# Altium PCB PumpkinV1.PcbDoc
Units mil, origin at the board's own origin, x right, y up, seen from the top; angles counter-clockwise.
Board outline 3745.29 x 3094.45 mil, 2 copper layers (Top Layer, Bottom Layer); 32 components, 42 nets, 161 pads, 0 vias.
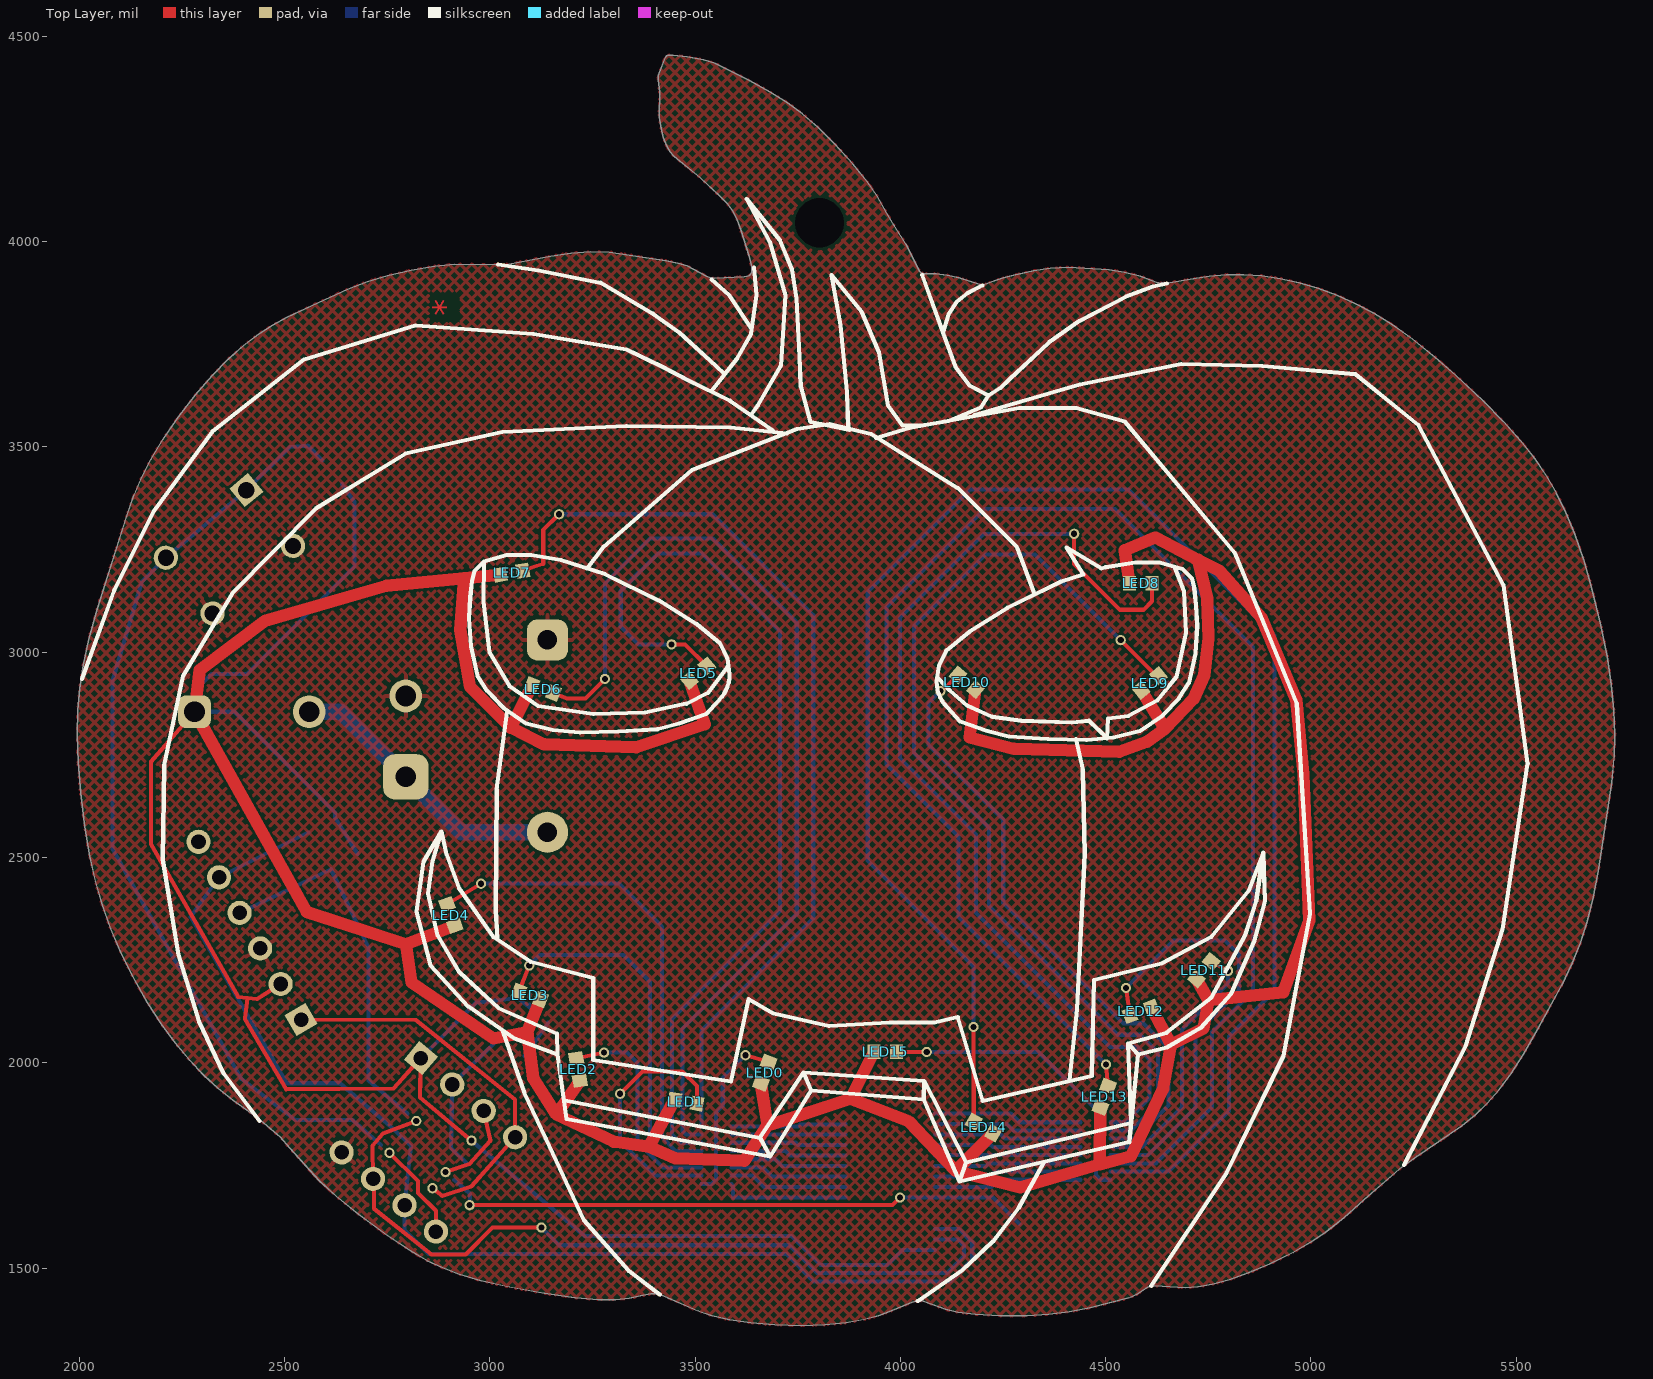
[diagram p0: Top Layer view]
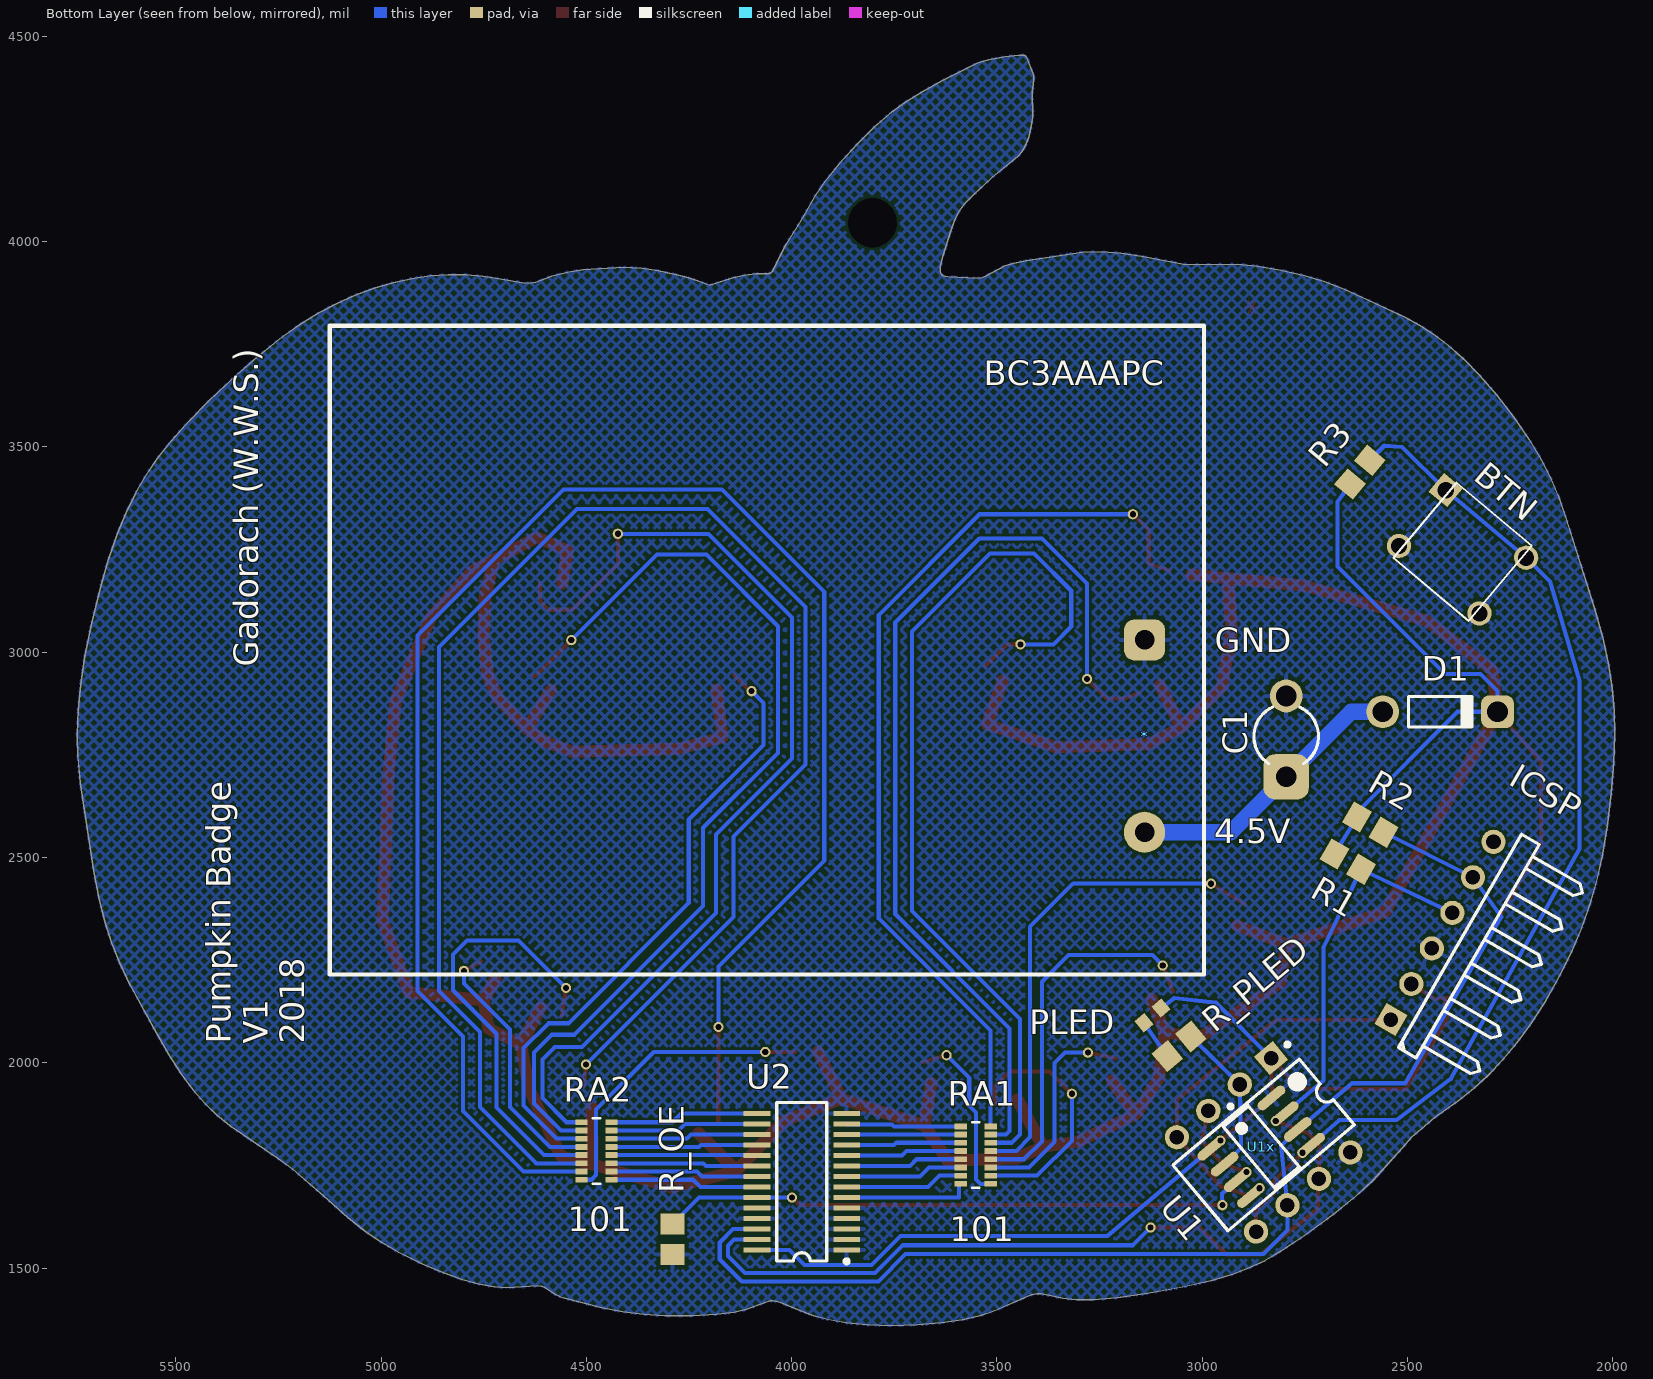
[diagram p1: Bottom Layer view, seen from below]

## Layer stack, top to bottom
Top Solder: solder mask 0.4, Solder Resist, Dk 3.5
Top Layer: signal copper 1.4
Dielectric 1: dielectric 12.6, FR-4, Dk 4.8
Bottom Layer: signal copper 1.4
Bottom Solder: solder mask 0.4, Solder Resist, Dk 3.5

## Board outline
2488.98,1819.07 2512.55,1792.4 2584.14,1712.75 2624.83,1675.61 2679.51,1631.18 2746.7,1581.62 2806.05,1541.98 2847.14,1518.13 2885.01,1500.19 2925.11,1485.11 2978.48,1469.45 3046.85,1453.74 3132.1,1438.17 3207.31,1427.81 3264.36,1423.12 3306.25,1423.06 3339.05,1426.28 3366.54,1431.88 3391.8,1437.02 3402.8,1437.06 3415.23,1434.63 3432.93,1427.95 3506.81,1395.29 3541.24,1384.01 3583.78,1374.14 3635.05,1366.32 3694,1361.3 3758,1359.79 3815.16,1361.83 3866.74,1366.93 3910.79,1374.54 3946.72,1384.03 3978.44,1395.82 4028.22,1416.56 4038.06,1419.16 4044.82,1420.01 4052.45,1419.67 4059.28,1418.19 4109.48,1399.27 4139.5,1392.64 4182.55,1387.36 4241.63,1384 4308.95,1383.92 4361.62,1387 4410.81,1393.3 4461.88,1403.21 4556.7,1426.99 4576.07,1436.45 4601.6,1452.93 4609.25,1455.14 4619.24,1456.26 4694.09,1452.32 4724.61,1454.21 4759.78,1460.34 4800.93,1471.4 4848.16,1487.98 4900.69,1510.25 4956.29,1537.73 4999.03,1562.57 5037.36,1588.65 5080.29,1622.54 5129.46,1666.17 5215.58,1741.08 5253.52,1768.37 5367.69,1846.28 5400.79,1873.47 5429.09,1900.93 5457.78,1934.02 5486.65,1973.07 5517.08,2020.46 5552.71,2082.25 5610.43,2188.31 5636.87,2243.24 5656.03,2290.99 5671.74,2340.4 5685.9,2397.31 5699.43,2466.53 5732.61,2682.14 5738.2,2743.67 5739.97,2800.08 5737.95,2858.67 5731.94,2921.39 5721.54,2989.66 5706.14,3065.88 5684.35,3155.04 5664.21,3225.09 5642.73,3287.69 5620.85,3340.89 5598,3387.59 5573.87,3429.27 5545.01,3471.62 5510.53,3515.4 5469.22,3561.74 5418.81,3612.74 5353.5,3673.88 5302.3,3718.92 5247.25,3763.09 5198.88,3797.42 5153.27,3825.61 5108.85,3849.13 5063.56,3869.37 5017.39,3886.43 4970.99,3900.1 4924.94,3910.24 4879.73,3916.85 4835.72,3919.98 4793.19,3919.71 4752.33,3916.18 4713.23,3909.52 4649.06,3899.14 4629.25,3899.71 4623.06,3901.34 4585.09,3915.87 4545.29,3925.93 4508.13,3931.64 4408.51,3938.08 4364.6,3935.36 4323.85,3929.34 4275.38,3918.48 4251.28,3911.81 4232.83,3905.75 4200.71,3894.58 4197.36,3894.75 4191.98,3896.09 4142.49,3912.24 4114.23,3918.16 4086.58,3921.69 4062.12,3921.8 4055.71,3922.26 4053.24,3922.95 4051.53,3923.74 4049.6,3925.07 4047.16,3927.55 4044.81,3930.85 4013.65,3993.8 3984.27,4040.04 3965.95,4070.37 3942.74,4111.7 3918.56,4146.33 3884.06,4189.04 3839.85,4237.89 3798.85,4278.67 3761.14,4311.44 3724.96,4338.33 3683.24,4364.53 3631.37,4393.03 3548.61,4434.47 3520.29,4443.05 3480.04,4450.56 3446.87,4454.19 3436,4454.24 3433.25,4453.82 3431.58,4453.26 3430.5,4452.67 3429.32,4451.75 3427.88,4450.09 3426.45,4447.78 3410.44,4404.83 3409.98,4394.75 3413.01,4364.5 3412.58,4304.5 3415.69,4282.05 3422.44,4253.62 3430.45,4232.99 3438.85,4219.16 3448.36,4208.32 3462.77,4195.92 3512.01,4156.43 3559.76,4111.43 3579.86,4091.09 3591.66,4074.98 3601.26,4055.84 3610.8,4029.54 3631.55,3964.28 3637.41,3939.13 3637.87,3931.12 3637.33,3926.37 3636.37,3923.27 3635.3,3921.25 3634.16,3919.79 3632.63,3918.45 3630.74,3917.35 3628.56,3916.53 3625.29,3915.79 3619.81,3915.27 3546.32,3910.68 3536.56,3912.46 3527.8,3915.56 3479.66,3941.11 3457.88,3948.12 3428.91,3953.94 3290.81,3974.92 3244.68,3975.58 3197.59,3972.33 3148.26,3965.06 3045.52,3945.55 3013.68,3944.45 2913.95,3945.3 2865.73,3940.25 2808.57,3930.64 2749.87,3917.37 2700.98,3902.76 2653.57,3884.53 2581.74,3851.61 2505.95,3815.83 2470.78,3796.94 2435.81,3774.64 2399.71,3747.12 2362.56,3713.99 2323.56,3674.19 2281.98,3626.32 2240.77,3572.99 2203.5,3518.91 2174.34,3470.52 2151.12,3425.42 2132.78,3382.5 2114.64,3331.03 2042.93,3105.57 2022.97,3031.74 2009.53,2968.66 2000.89,2911.77 1996.25,2859.16 1994.68,2798.92 1996.74,2732.55 2002.81,2657.14 2012.83,2574.91 2024.99,2503.29 2039.06,2440.85 2055.17,2384.72 2075.69,2327.03 2100.72,2268.38 2130.53,2208.5 2165.49,2147.12 2199.31,2094.72 2233.42,2048.05 2267.88,2006.54 2302.75,1969.74 2338.06,1937.28 2373.87,1908.85 2433.1,1866.58

## Design rules (kind name [scope] priority, off if disabled: settings)
Clearance [All] p1: gap=6
PolygonConnect [All] p1: connectstyle=Relief reliefconductorwidth=10 reliefentries=4 polygonreliefangle="90 Angle" airgapwidth=10
RoutingVias [All] p1: holewidth=28 width=50 viastyle="Through Hole" minholewidth=28 minwidth=50 maxholewidth=28 maxwidth=50
SolderMaskExpansion [All] p1: expansion=4
Width [All] p1: maxlimit=50 minlimit=6 preferedwidth=10
30 further rules are at their usual default settings.

## Components (designator, comment, footprint, x,y, rotation, side; value= is the part's Value field where it differs from the comment)
* "BC3AAAPC" BC3AAAPC 4825.04,3815.43 r180 bottom
BTN "430156043726" 4301x60437x6 2365.39,3244.69 r220 bottom
C1 "Cap2" CAPR5-4X5 2795,2795 r90 bottom
D1 "Diode 1N4148" DO-35 2420,2855 r180 bottom
ICSP "Header 6H" HDR1X6H 2540,2105.19 r120 bottom
LED0 "LED" 1608[0603] 3669.21,1975.73 r70 top
LED1 "LED" 1608[0603] 3477.13,1905.17 r350 top
LED2 "LED" 1608[0603] 3214.48,1983.57 r100 top
LED3 "LED" 1608[0603] 3096.88,2163.9 r160 top
LED4 "LED" 1608[0603] 2904.79,2359.9 r110 top
LED5 "LED" 1608[0603] 3507.02,2948.9 r40 top
LED6 "LED" 1608[0603] 3128.4,2910.43 r340 top
LED7 "LED" 1608[0603] 3052.56,3193.84 r10 top
LED8 "LED" 1608[0603] 4585.52,3167.81 r0 top
LED9 "LED" 1608[0603] 4607.19,2924.9 r40 top
LED10 "LED" 1608[0603] 4161.67,2926.82 r140 top
LED11 "LED" 1608[0603] 4739.13,2225.19 r50 top
LED12 "LED" 1608[0603] 4585.13,2125.1 r200 top
LED13 "LED" 1608[0603] 4496.35,1916.93 r70 top
LED14 "LED" 1608[0603] 4202.35,1842.45 r150 top
LED15 "LED" 1608[0603] 3963.22,2026.69 r0 top
PLED "LED" 1608[0603] 3120.69,2115.43 r320 bottom
R1 "Res3" 2012[0805] 2645,2490 r210 bottom
R2 "Res3" 2012[0805] 2590,2580 r210 bottom
R3 "Res3" 2012[0805] 2615.42,3438.53 r310 bottom
R_OE "Res3" 2012[0805] 4290,1570 r90 bottom
R_PLED "Res3" 2012[0805] 3055.93,2040.14 r140 bottom
RA1 "Res Pack3" EXB2HV 3551.5,1775 r180 bottom
RA2 "Res Pack3" EXB2HV 4475,1785 r0 bottom
U1 "PIC12LF1572-E/P" MCHP-PDIP-P8 2850,1800 r230 bottom
U1x "PIC12LF1572-I/SN" MCHP-SOIC-SN8_N 2855.83,1795.36 r140 bottom
U2 "PCA9685PW" TSSOP28 3975,1710 r90 bottom

## Footprints (in the part's own frame and the unit in brackets; to place one, negate y for a bottom-side part, rotate by r counter-clockwise, add the part's x,y. Pads: shape width x height; smd on the part's side, far side on the other; paste and mask are expansions set on the pad)
1608[0603] [mm] "Chip Capacitor, Body 1.6x0.8mm, IPC High Density"
  rect 0.8x0.9 smd: 1(-0.7,0) 2(0.7,0)
  body extent -0.87,-0.48 0.87,0.48, height 1.3
2012[0805] [mm] "Chip Resistor; Body 2.0 x 1.3 mm (LxW typ)"
  rect 1.3x1.5 smd: 1(-0.95,0) 2(0.95,0)
4301x60437x6 [mm] "6*6mm vertical type, THT, height 4.3mm, salmon actuator 360gf, Bulk"
  rect 1.5x1.5 hole 1: 1(-3.25,2.25)
  round 1.5 hole 1: 2(-3.25,-2.25) 3(3.25,2.25) 4(3.25,-2.25)
  silkscreen extent -3.04,-3.04 3.04,3.04, body extent -3.95,-3.1 3.95,3.1, height 4.31
BC3AAAPC [mm] "AAA Battery Holder, 3 Cell"
  round 2.54 hole 1.2: 0(42.8,-31.85)
  rrect50% 2.54x2.54 hole 1.2: 1(42.8,-19.95)
  silkscreen extent -7.62,-40.64 46.48,-0.51
CAPR5-4X5 [mil] "Capacitor; 2 Leads"
  rrect50% 110x110 hole 50: 1(-98.43,0)
  round 80 hole 50: 2(98.43,0)
  silkscreen extent -66,-79 72,79
DO-35 [mil] "Diode, Axial; Body 3.8 x 1.9 mm (LxDia. max), Lead Dia. 0.53 mm (max)"
  round 80 hole 50: 1(-139.76,0)
  rrect50% 80x80 hole 50: 2(139.76,0)
  silkscreen extent -77,-37 81,37
EXB2HV [mil]
  rect 30x14 smd: 1(-36.5,70) 2(-36.5,50) 3(-36.5,30) 4(-36.5,10) 5(-36.5,-10) 6(-36.5,-30) 7(-36.5,-50) 8(-36.5,-70) 9(36.5,-70) 10(36.5,-50) 11(36.5,-30) 12(36.5,-10) 13(36.5,10) 14(36.5,30) 15(36.5,50) 16(36.5,70)
  silkscreen extent -9,-80 9,80, body extent 0,0 10,10, height 10
HDR1X6H [mm] "Connector; Header; 6 Position; Right Angle"
  rect 1.5x1.5 hole 0.9: 1(0,0)
  round 1.5 hole 0.9: 2(2.54,0) 3(5.08,0) 4(7.62,0) 5(10.16,0) 6(12.7,0)
  silkscreen extent -1.27,-6.35 13.97,-1.27
MCHP-PDIP-P8 [mm] "PDIP, 8-Leads, Body 9.5x6.604mm, Pitch 2.54mm"
  rect 1.5x1.5 hole 0.9: 1(-3.81,3.81)
  round 1.5 hole 0.9: 2(-3.81,1.27) 3(-3.81,-1.27) 4(-3.81,-3.81) 5(3.81,-3.81) 6(3.81,-1.27) 7(3.81,1.27) 8(3.81,3.81)
  silkscreen extent -3.93,-5.1 2.65,5.23, body extent -3.95,-5.08 3.95,5.08, height 5.34
MCHP-SOIC-SN8_N [mm] "SOIC, 8-Leads, Body 4.9x3.9mm, Pitch 1.27mm, IPC Medium Density"
  oval 2.05x0.6 smd: 1(-2.425,1.905) 2(-2.425,0.635) 3(-2.425,-0.635) 4(-2.425,-1.905) 5(2.425,-1.905) 6(2.425,-0.635) 7(2.425,0.635) 8(2.425,1.905)
  silkscreen extent -1,-2.45 1,3.26, body extent -1.95,-2.45 1.95,2.45, height 1.75
TSSOP28 [mm] "Shrink Small Outline; 28 Leads; Body Width 4.4 mm; Pitch 0.65 mm"
  rect 0.3x1.65 smd: 1(-4.225,-2.775) 2(-3.575,-2.775) 3(-2.925,-2.775) 4(-2.275,-2.775) 5(-1.625,-2.775) 6(-0.975,-2.775) 7(-0.325,-2.775) 8(0.325,-2.775) 9(0.975,-2.775) 10(1.625,-2.775) 11(2.275,-2.775) 12(2.925,-2.775) 13(3.575,-2.775) 14(4.225,-2.775) 15(4.225,2.775) 16(3.575,2.775) 17(2.925,2.775) 18(2.275,2.775) 19(1.625,2.775) 20(0.975,2.775) 21(0.325,2.775) 22(-0.325,2.775) 23(-0.975,2.775) 24(-1.625,2.775) 25(-2.275,2.775) 26(-2.925,2.775) 27(-3.575,2.775) 28(-4.225,2.775)
  silkscreen extent -5.05,-2.9 4.9,1.55

## Part data
*: "AAA Battery Holder, 3 Cell"
BTN: library part "WS-TATV, 430156043726", "WS-TATV 6x6 mm THT"
C1: "Capacitor"
D1: "High Conductance Fast Diode"
ICSP: "Header, 6-Pin, Right Angle"
LED0 LED1 LED2 LED3 LED4 LED5 LED6 LED7 LED8 LED9 LED10 LED11 LED12 LED13 LED14 LED15 PLED: library part LED2, "Typical RED, GREEN, YELLOW, AMBER GaAs LED"
R1 R2 R3 R_OE R_PLED: "Resistor"
RA1 RA2: "Isolated Resistor Network"
U1: "Microcontroller with High Precision 16-Bit PWMs, 2K (x14-Bit words) Program Memory, 256 Bytes SRAM, 6 I/O, Extended Temperature, 8-Pin PDIP (P8), Tube"
U1x: "Microcontroller with High Precision 16-Bit PWMs, 2K (x14-Bit words) Program Memory, 256 Bytes SRAM, 6 I/O, Industrial Temperature, 8-Pin SOIC (SN8), Tube"
U2: "IC LED DRIVER RGBA 28-TSSOP"

## Free pads (board coordinates)
  round 25 hole 15: 2(2755.17,1780.6) 2(2820.49,1858.16) 2(2859.94,1694.46) 2(2891.8,1733.52) 2(2950.48,1653.07) 2(2955.32,1810.22) 2(2978.21,2436.23) 2(3095.74,2236.86) 2(3125.25,1598.65) 2(3168.55,3336.16) 2(3277.89,2024.6) 2(3280.07,2934.96) 2(3317.12,1924.42) 2(3442.31,3019.24) 2(3622.44,2018.39) 2(3998.93,1671.61) 2(4063.89,2026.24) 2(4097.32,2905.18) 2(4177.99,2087.2) 2(4423.14,3288.48) 2(4500.78,1995.86) 2(4536.51,3029.48) 2(4549.35,2182.22) 2(4798.11,2223.87)
  round 0 hole 120: 6(3802.8,4046.37)

## Nets (pads, with @x,y where several pads share a name; then routed paths per layer and width w, separated by ;. In a path a pad name is that pad's centre, name@x,y a point inside that pad or via, vN(x,y) a via of type N, cw(c..) or ccw(c..) an arc to the next point about the centre after c; other vN are vias at no path point)
GND: *.1 BTN.2 BTN.4 C1.2 ICSP.3 R_OE.1 U1.8 U1x.8 U2.1 U2.2 U2.3 U2.4 U2.5 U2.14 U2.24 U2.25
Net*_0: *.0 C1.1 D1.1 | length 701.8
  Bottom Layer w40: D1.1 2636.57,2855 C1.1 2930.08,2561.5 *.0
NetBTN_1: BTN.1 BTN.3 pad.2@2755.17,1780.6 R3.1 U1.5 U1x.5 | length 2521.4
  Top Layer w10: pad.2@2755.17,1780.6 2824.81,1711.68 2824.81,1683.12 2868.5,1639.43 U1.5
  Bottom Layer w10: R3.1 2556.17,3503.01 2513,3500.04 BTN.1 BTN.3 2152.6,3172.47 2080.69,2930.86 2080.69,2520.16 2393.91,1960.83 2526.55,1860.15 2665.87,1860.15 U1x.5
NetICSP_1: ICSP.1 pad.2@2859.94,1694.46 U1.4 U1x.4 | length 946.4
  Top Layer w10: ICSP.1 2818.81,2104.58 3061.32,1909.5 U1.4 2954.41,1698.26 2883.67,1675.79 pad.2@2859.94,1694.46
NetICSP_4: ICSP.4 pad.2@2820.49,1858.16 pad.2@3125.25,1598.65 R1.2 U1.7 U1x.7 U2.27 | length 2855.8
  Top Layer w10: pad.2@2820.49,1858.16 2739.21,1827.27 2713.68,1797.75 U1.7 2717.58,1714.94 2717.58,1644.24 2856.86,1533.28 2941.04,1533.28 3006.41,1598.65 pad.2@3125.25,1598.65
  Bottom Layer w10: ICSP.4 R1.2 2703.79,2282.25 2703.79,1956.6 U1x.7 ; pad.2@3125.25,1598.65 3168.37,1555.54 3728.57,1555.54 3796.75,1487.35 4113.01,1487.35 4154.87,1529.21 4154.87,1554.16 4139.78,1569.25 U2.27
NetICSP_5: ICSP.5 R2.2 U1.6 U1x.6 U2.26 | length 2998.4
  Bottom Layer w10: R2.2 ICSP.5 2271.16,2355.47 2505.09,1949.96 2634.6,1949.96 U1x.6 2807.36,1796.84 U1.6 2791.88,1592.37 2850.36,1533.89 3721.93,1533.89 3788.47,1467.35 4121.29,1467.35 4174.87,1520.92 4174.87,1562.45 4142.47,1594.84 U2.26
NetLED0_2: LED0.2 pad.2@3622.44,2018.39 RA1.9 | length 431
  Top Layer w10: pad.2@3622.44,2018.39 LED0.2
  Bottom Layer w10: RA1.9 3539.66,1705 3550.66,1716 3550.66,1878.84 3566.99,1895.16 3566.99,1962.94 pad.2@3622.44,2018.39
NetLED1_2: LED1.2 pad.2@3317.12,1924.42 RA1.10 | length 615
  Top Layer w10: pad.2@3317.12,1924.42 3371.59,1978.89 3468.42,1978.89 3504.27,1943.03 LED1.2
  Bottom Layer w10: pad.2@3317.12,1924.42 3317.12,1809.53 3401.64,1725 RA1.10
NetLED2_2: LED2.2 pad.2@3277.89,2024.6 RA1.11 | length 535
  Top Layer w10: LED2.2 pad.2@3277.89,2024.6
  Bottom Layer w10: pad.2@3277.89,2024.6 3333.93,2024.6 3359.15,1999.38 3359.15,1807.43 3421.58,1745 RA1.11
NetLED3_2: LED3.2 pad.2@3095.74,2236.86 RA1.12 | length 931.7
  Top Layer w10: LED3.2 pad.2@3095.74,2236.86
  Bottom Layer w10: pad.2@3095.74,2236.86 3120.96,2262.08 3325.52,2262.08 3390.24,2197.37 3390.24,1808.24 3433.48,1765 RA1.12
NetLED4_2: LED4.2 pad.2@2978.21,2436.23 RA1.13 | length 1203.8
  Top Layer w10: LED4.2 pad.2@2978.21,2436.23
  Bottom Layer w10: pad.2@2978.21,2436.23 3313.84,2436.23 3418.68,2331.39 3418.68,1818.83 3452.51,1785 RA1.13
NetLED5_2: LED5.2 pad.2@3442.31,3019.24 RA1.14 | length 2255.7
  Top Layer w10: pad.2@3442.31,3019.24 3475.5,3019.24 LED5.2
  Bottom Layer w10: pad.2@3442.31,3019.24 3362.04,3019.24 3318.65,3062.63 3318.65,3149.85 3409.77,3240.97 3516.95,3240.97 3707.01,3050.92 3707.01,2369.66 3443.62,2106.26 3443.62,1825.52 3464.13,1805 RA1.14
NetLED6_2: LED6.2 pad.2@3280.07,2934.96 RA1.15 | length 2381.5
  Top Layer w10: LED6.2 3187.73,2887.65 3232.76,2887.65 pad.2@3280.07,2934.96
  Bottom Layer w10: pad.2@3280.07,2934.96 3280.07,3167.07 3390.01,3277.01 3542.72,3277.01 3747.34,3072.39 3747.34,2362.32 3468.85,2083.83 3468.85,1833.61 3477.46,1825 RA1.15
NetLED7_2: LED7.2 pad.2@3168.55,3336.16 RA1.16 | length 2268.9
  Top Layer w10: LED7.2 3129.74,3215.48 3129.74,3297.36 pad.2@3168.55,3336.16
  Bottom Layer w10: pad.2@3168.55,3336.16 3542.46,3336.16 3787.43,3091.19 3787.43,2351.43 3515,2079 RA1.16
NetLED8_2: LED8.2 pad.2@4423.14,3288.48 RA2.9 | length 2452.3
  Top Layer w10: pad.2@4423.14,3288.48 4423.14,3214.7 4534.4,3103.44 4592.25,3103.44 4613.08,3124.26 LED8.2
  Bottom Layer w10: pad.2@4423.14,3288.48 4202.33,3288.48 3998.49,3084.65 3998.49,2741.53 4183.64,2556.39 4183.64,2364.52 4510.26,2037.91 4576.72,2037.91 4606.8,2007.82 4606.8,1914.08 4547.72,1855 RA2.9
NetLED9_2: LED9.2 pad.2@4536.51,3029.48 RA2.10 | length 2373.3
  Top Layer w10: pad.2@4536.51,3029.48 4623.37,2942.61 LED9.2
  Bottom Layer w10: RA2.10 4561.26,1835 4626.99,1900.74 4626.99,2025.35 4584.02,2068.33 4529.12,2068.33 4215.43,2382.01 4215.43,2572.52 4033.04,2754.9 4033.04,3063.34 4207.55,3237.84 4328.14,3237.84 pad.2@4536.51,3029.48
NetLED10_2: LED10.2 pad.2@4097.32,2905.18 RA2.11 | length 1526.5
  Top Layer w10: pad.2@4097.32,2905.18 4101.2,2905.18 LED10.2
  Bottom Layer w10: pad.2@4097.32,2905.18 4067.96,2875.82 4067.96,2774.43 4250.45,2591.94 4250.45,2389.27 4543.61,2096.1 4592.3,2096.1 4652.6,2035.8 4652.6,1895.44 4572.16,1815 RA2.11
NetLED11_2: LED11.2 pad.2@4798.11,2223.87 RA2.12 | length 639.7
  Top Layer w10: LED11.2 pad.2@4798.11,2223.87
  Bottom Layer w10: RA2.12 4588.57,1795 4685.94,1892.37 4685.94,2080.6 4798.11,2192.77 pad.2@4798.11,2223.87
NetLED12_2: LED12.2 pad.2@4549.35,2182.22 RA2.13 | length 1077.2
  Top Layer w10: pad.2@4549.35,2182.22 LED12.2
  Bottom Layer w10: RA2.13 4603,1775 4718.7,1890.7 4718.7,2070.61 4824.76,2176.67 4824.76,2263.84 4790.33,2298.27 4665.4,2298.27 pad.2@4549.35,2182.22
NetLED13_2: LED13.2 pad.2@4500.78,1995.86 RA2.14 | length 3986.5
  Top Layer w10: pad.2@4500.78,1995.86 LED13.2
  Bottom Layer w10: pad.2@4500.78,1995.86 4141.21,2355.43 4141.21,2551.5 3966.34,2726.36 3966.34,3110.55 4204.8,3349 4522.74,3349 4859.23,3012.51 4859.23,2175.26 4758.55,2074.58 4758.55,1891.76 4621.79,1755 RA2.14
NetLED14_2: LED14.2 pad.2@4177.99,2087.2 RA2.15 | length 4193.1
  Top Layer w10: pad.2@4177.99,2087.2 LED14.2
  Bottom Layer w10: pad.2@4177.99,2087.2 4177.99,2234.81 3920.19,2492.61 3920.19,3146.79 4169.93,3396.53 4555.02,3396.53 4911.11,3040.44 4911.11,2175.2 4799.94,2064.02 4799.94,1881.95 4652.99,1735 RA2.15
NetLED15_2: LED15.2 pad.2@4063.89,2026.24 RA2.16 | length 742.9
  Top Layer w10: LED15.2 pad.2@4063.89,2026.24
  Bottom Layer w10: pad.2@4063.89,2026.24 4335.62,2026.24 4475.99,1885.87 4475.99,1726.63 4487.62,1715 RA2.16
NetPLED_2: PLED.2 R_PLED.1 | length 99.7
  Bottom Layer w10: R_PLED.1 PLED.2
NetR_OE_2: pad.2@2891.8,1733.52 pad.2@2950.48,1653.07 pad.2@3998.93,1671.61 R_OE.2 U1.3 U1x.3 U2.23 | length 1665
  Top Layer w10: pad.2@2891.8,1733.52 2949.79,1753.25 3000.83,1810.08 U1.3 ; pad.2@2950.48,1653.07 3980.39,1653.07 pad.2@3998.93,1671.61
  Bottom Layer w10: U1x.3 2951.22,1681.03 pad.2@2950.48,1653.07 ; pad.2@3998.93,1671.61 U2.23 4225.79,1671.61 R_OE.2
NetR_PLED_2: R_PLED.2 U1.2 U1x.2 | length 377.5
  Bottom Layer w10: U1x.2 2905.31,1792.87 U1.2 R_PLED.2
NetRA1_1: RA1.1 U2.13 | length 280.1
  Bottom Layer w10: RA1.1 3750,1845 3755,1850 3865,1850 U2.13
NetRA1_2: RA1.2 U2.12 | length 277.8
  Bottom Layer w10: RA1.2 3865.59,1825 U2.12
NetRA1_3: RA1.3 U2.11 | length 280
  Bottom Layer w10: RA1.3 3745,1805 3750.43,1799.57 U2.11
NetRA1_4: RA1.4 U2.10 | length 282.3
  Bottom Layer w10: RA1.4 3720,1785 3731.02,1773.98 U2.10
NetRA1_5: RA1.5 U2.9 | length 284.6
  Bottom Layer w10: RA1.5 3695,1765 3711.61,1748.39 U2.9
NetRA1_6: RA1.6 U2.8 | length 286.9
  Bottom Layer w10: RA1.6 3665,1745 3687.2,1722.8 U2.8
NetRA1_7: RA1.7 U2.7 | length 289.3
  Bottom Layer w10: RA1.7 3640,1725 3667.8,1697.2 U2.7
NetRA1_8: RA1.8 U2.6 | length 309
  Bottom Layer w10: RA1.8 3588,1703 3591.61,1699.39 3591.61,1671.61 U2.6
NetRA2_1: RA2.1 U2.22 | length 361.6
  Bottom Layer w10: U2.22 4222.2,1697.2 4240,1715 RA2.1
NetRA2_2: RA2.2 U2.21 | length 359.3
  Bottom Layer w10: U2.21 4217.8,1722.8 4230,1735 RA2.2
NetRA2_3: RA2.3 U2.20 | length 357
  Bottom Layer w10: U2.20 4208.39,1748.39 4215,1755 RA2.3
NetRA2_4: RA2.4 U2.19 | length 354.7
  Bottom Layer w10: U2.19 4085.28,1775 RA2.4
NetRA2_5: RA2.5 U2.18 | length 356.1
  Bottom Layer w10: U2.18 4220.43,1799.57 4225,1795 RA2.5
NetRA2_6: RA2.6 U2.17 | length 358.5
  Bottom Layer w10: U2.17 4244.84,1825.16 4255,1815 RA2.6
NetRA2_7: RA2.7 U2.16 | length 360.8
  Bottom Layer w10: U2.16 4259.25,1850.75 4275,1835 RA2.7
NetRA2_8: RA2.8 U2.15 | length 363.1
  Bottom Layer w10: U2.15 4268.66,1876.34 4290,1855 RA2.8
VCC4V: D1.2 ICSP.2 LED0.1 LED1.1 LED2.1 LED3.1 LED4.1 LED5.1 LED6.1 LED7.1 LED8.1 LED9.1 LED10.1 LED11.1 LED12.1 LED13.1 LED14.1 LED15.1 pad.2@2955.32,1810.22 PLED.1 R1.1 R2.1 R3.2 U1.1 U1x.1 U2.28 | length 14079
  Top Layer w10: D1.2 2173.93,2732.58 2173.93,2533.4 2386.39,2160.65 2409.15,2157.8 ; ICSP.2 2431.91,2154.96 2409.15,2157.8 ; pad.2@2955.32,1810.22 2829.3,1915.31 U1.1 2764.87,1937.18 2503.54,1935.32 2403.11,2107.37 2409.15,2157.8
  Top Layer w30: LED4.1 2795.17,2288.63 ; LED7.1 2937.61,3180.47 ; LED6.1 3050.86,2816.18 ; LED3.1 3090.76,2075.22 ; LED2.1 3161.89,1874.08 ; LED1.1 3387.57,1795.58 ; LED5.1 3523.6,2824.62 3356.45,2768.91 3131.9,2775.66 3050.86,2816.18 ; LED0.1 3675.79,1847.1 ; LED15.1 3878.17,1912.1 ; LED10.1 4168.46,2792.21 4276.65,2764.82 4532.72,2757.98 4600.43,2781.8 4644.42,2813.65 ; LED14.1 4134.5,1736.71 ; LED13.1 4485.28,1752.66 ; LED8.1 4546.47,3248.36 4621.73,3279.72 4725.25,3225.24 ; LED9.1 4644.42,2813.65 ; LED12.1 4659.44,2044.56 ; LED11.1 4750.2,2152.49 ; 2795.17,2288.63 2553.55,2367.13 D1.2 2292.82,2956.84 2451.02,3075.98 2747.87,3161.91 2937.61,3180.47 ; 2795.17,2288.63 2808.66,2195.42 3008.58,2059.28 3090.76,2075.22 ; 2937.61,3180.47 2927.61,3054.24 2951.25,2915.79 3050.86,2816.18 ; 3090.76,2075.22 3105.48,1962.39 3161.89,1874.08 ; 3161.89,1874.08 3301.71,1807.85 3387.57,1795.58 ; 3387.57,1795.58 3451.35,1767.37 3619.38,1761.24 3675.79,1847.1 ; 3675.79,1847.1 3765.33,1875.31 3878.17,1912.1 ; 3878.17,1912.1 4020.44,1856.91 4134.5,1736.71 ; 4134.5,1736.71 4291.49,1696.24 4485.28,1752.66 ; 4485.28,1752.66 4561.32,1772.28 4639.82,1936.63 4659.44,2044.56 ; 4644.42,2813.65 4714.19,2886.46 4739.98,2944.1 4750.6,3033.59 4747.56,3129.14 4725.25,3225.24 ; 4659.44,2044.56 4737.94,2083.81 4750.2,2152.49 ; 4725.25,3225.24 4777.85,3197.56 4880.55,3082.53 4964.09,2883.96 4981.89,2703.2 4995.58,2345.79 4932.59,2171.87 4750.2,2152.49
  Bottom Layer w10: R3.2 2670.38,3365.54 2670.38,3208.93 2408.29,2946.84 2322,2946.84 2280.24,2905.08 D1.2 2377.37,2855 2622.39,2609.97 R2.1 R1.1 ; U1.1 2965.67,2146.11 3068.39,2157.4 PLED.1 PLED.1@3096.33,2141.24 ; pad.2@2955.32,1810.22 U1x.1@2977.34,1791.65 ; U2.28 4004.88,1543.66 3968.57,1507.35 3805.04,1507.35 3734.8,1577.58 3231.17,1577.58 U1x.1@2977.34,1791.65 ; U1x.1@2977.34,1791.65 U1x.1 U1x.1@2977.34,1791.65
pads on no net: ICSP.6

## Polygon pours and split planes (outlines as drawn)
GND on Top Layer "GND_TOP" (hatched 45Degree grid 20 track 8, pour order 2): 241 vertices, not listed, extent 1994.68,1359.79 5739.97,4454.24
GND on Bottom Layer "GND_BOT" (hatched 45Degree grid 20 track 8, pour order 3): 241 vertices, not listed, extent 1994.68,1359.79 5739.97,4454.24

## Silkscreen, mask and mechanical layers (free items; w line width, h text height)
Top Overlay:
  drawing of 260 lines, arcs and shapes, not listed
Bottom Overlay:
  lines w10: 2761.59,1742.91 2820.96,1693.46 ; 2889.81,1896.36 2949.19,1846.92
  text "Gadorach (W.W.S.)" at 5299.09,2964.1 h60 r270
  text "Pumpkin Badge / V1 / 2018" at 5186.45,2046.83 h60 r270
  text "101" at 4545,1590 h60
  text "101" at 3615,1565 h60

## Text inside footprints (layer, text, board x,y; h text height)
*: Bottom Overlay "GND" at 2968.45,2999.84 h60; Bottom Overlay "4.5V" at 2970.48,2534.5 h60